# EAGLE board rwr_schematic (EAGLE 7.4.0)
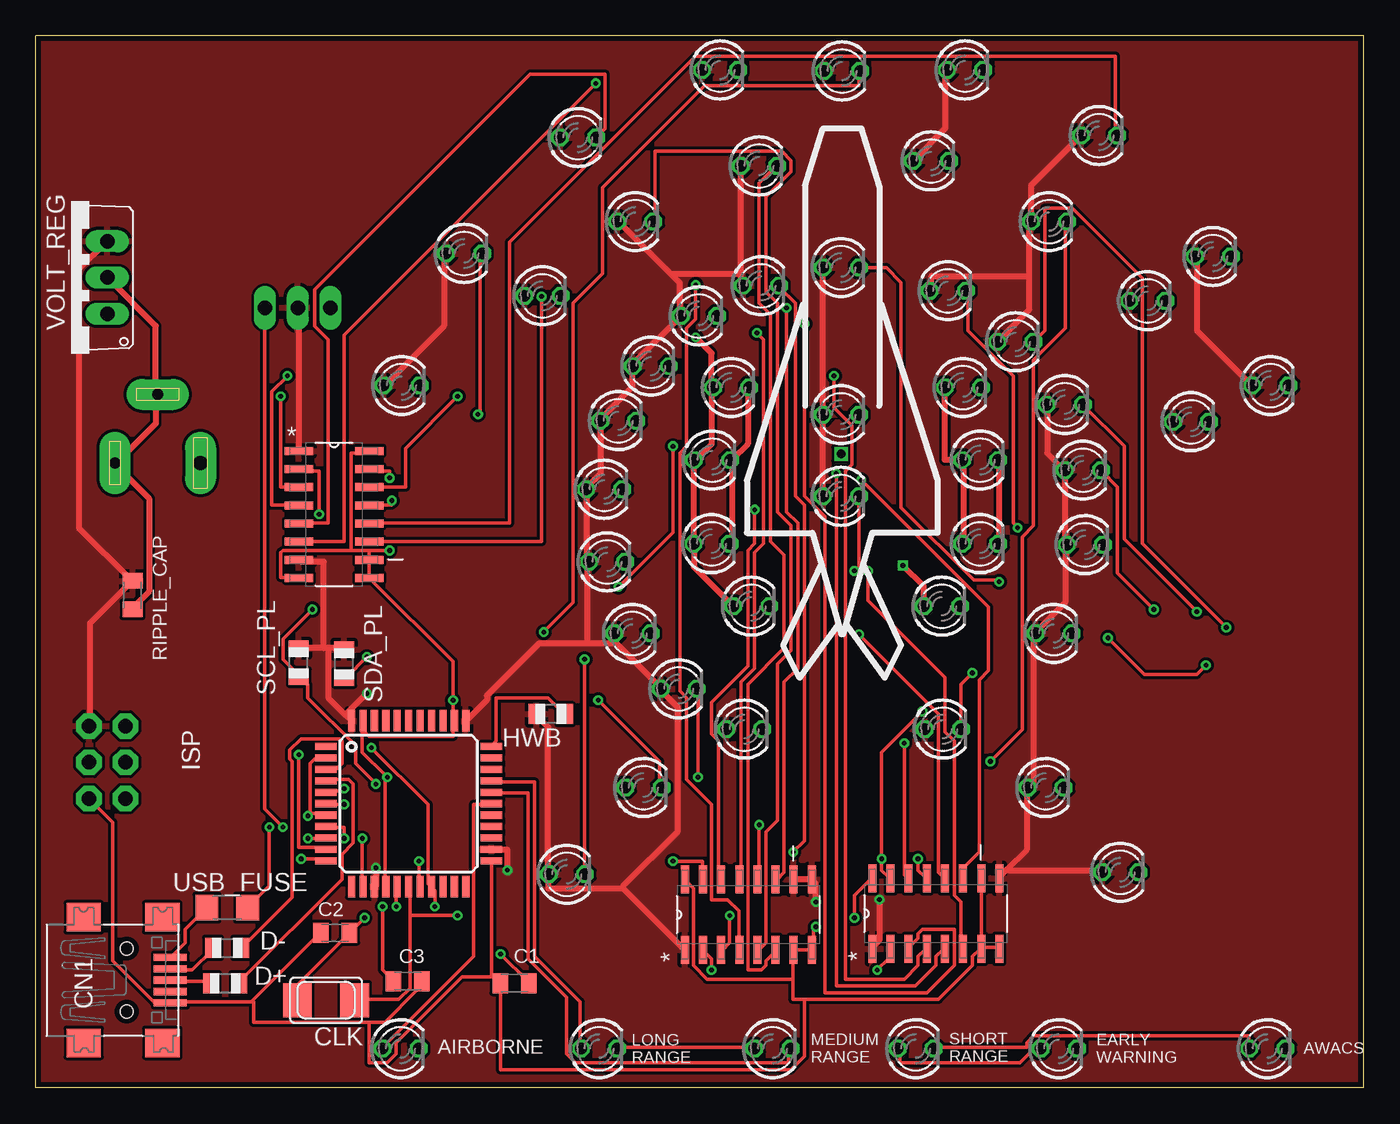
[diagram p0: board, top side]
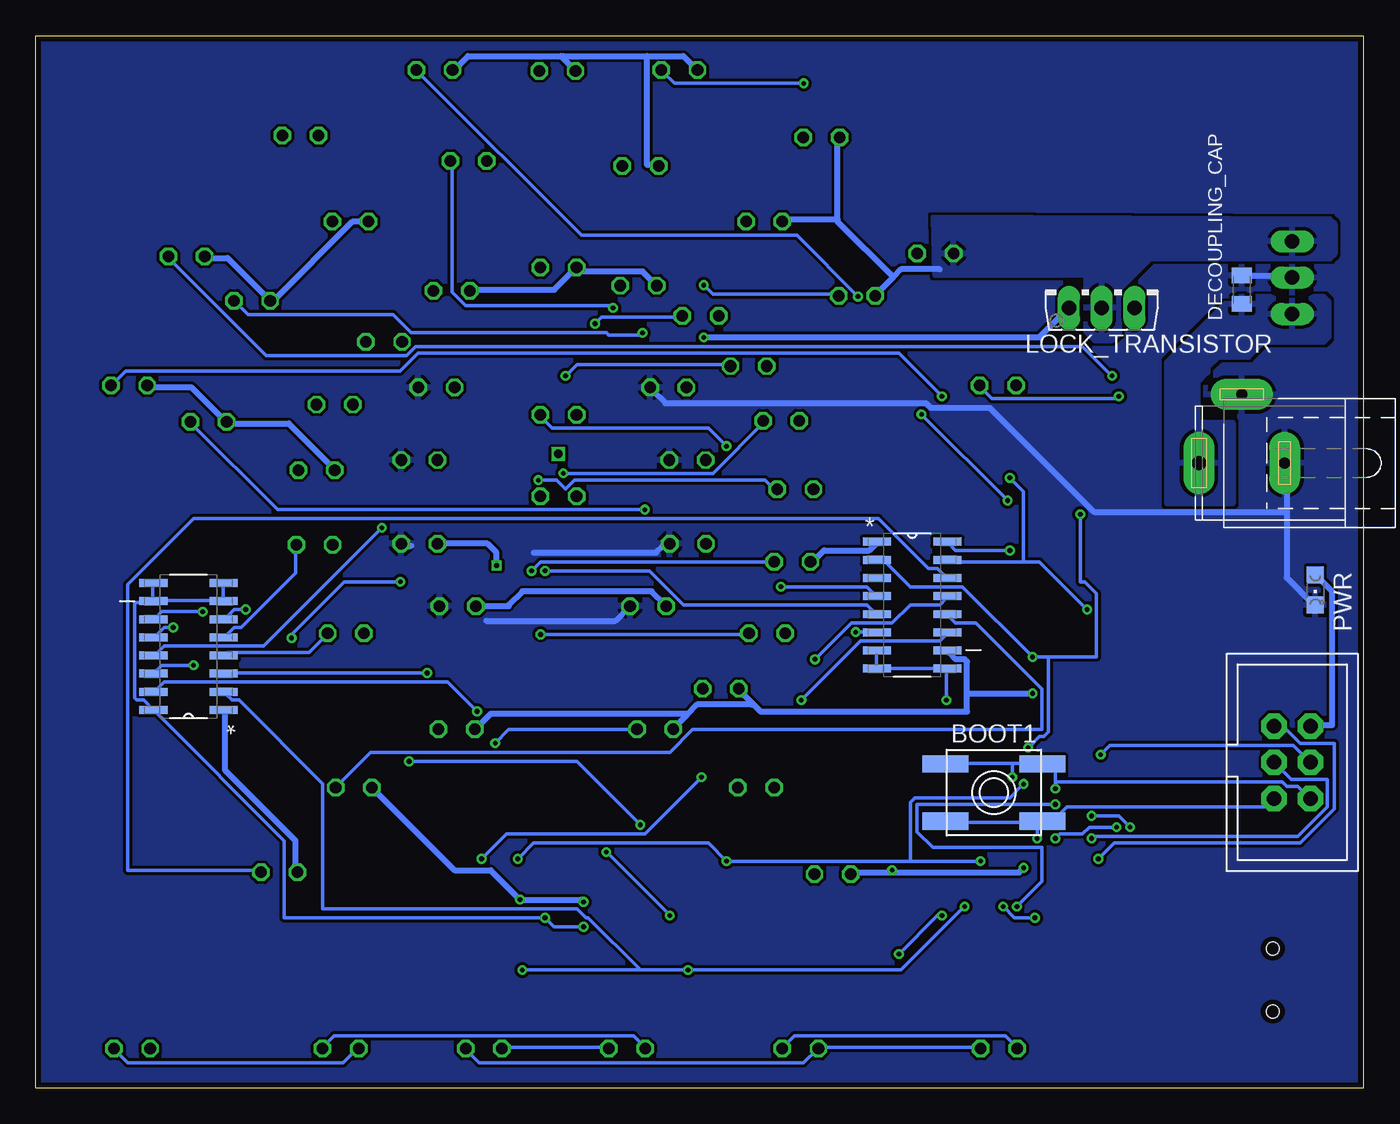
[diagram p1: board, bottom side, seen from below]

Size 92.96 x 73.66 mm. Coordinates in mm from the lower left corner, seen from the top.
Outline: 92.96,0 92.96,73.66 0,73.66 0,0 92.96,0
Copper layers (1*16): Top 0.0356mm / dielectric 1.5011mm / Bottom 0.0356mm
Design rules "LaenPCBOrder": minimum track width 6mil, minimum drill 13mil, track to track 6mil, track to pad 6mil, pad to pad 6mil, via to via 6mil, smd to smd 6mil, copper to edge 15mil, drill to drill 6mil, minimum pad ring 7mil, minimum via ring 7mil, stop-mask expansion 3mil, vias tented up to drill 0mil, thermal gap 10mil
Net classes: 0 default: width 0.254 mm; 1 Power: width 0.406 mm

## Footprints (pad centres in the part's own frame; a part is rotated, then mirrored left to right if it is on the bottom)
LED3MM = drill 0.813 octagon: A -1.27,0; K 1.27,0
EVQ-Q2 = smd 3.2 x 1.2: A -3.4,-2; A' 3.4,-2; B -3.4,2; B' 3.4,2
C0805K = smd 1.1 x 1.4: 1 -1,0; 2 1,0
NX5032 = smd 2 x 2.4: P$1 2,0; P$2 -2,0
USB-MINIB = smd 0.5 x 2.308: D+ 0,4.064; D- -0.8,4.064; GND 1.6,4.064; ID 0.8,4.064; VBUS -1.6,4.064 | smd 2 x 2.4: GND1 -4.4,-2; GND2 -4.4,3.5; GND3 4.4,3.5; GND4 4.4,-2 | hole 0.9: -2.2,1; 2.2,1
R0805 = smd 1.1 x 1.4: 1 -1,0; 2 1,0
TQFP44 = smd 1.5 x 0.5: 1 -5.8,4; 2 -5.8,3.2; 3 -5.8,2.4; 4 -5.8,1.6; 5 -5.8,0.8; 6 -5.8,0; 7 -5.8,-0.8; 8 -5.8,-1.6; 9 -5.8,-2.4; 10 -5.8,-3.2; 11 -5.8,-4; 23 5.8,-4; 24 5.8,-3.2; 25 5.8,-2.4; 26 5.8,-1.6; 27 5.8,-0.8; 28 5.8,0; 29 5.8,0.8; 30 5.8,1.6; 31 5.8,2.4; 32 5.8,3.2; 33 5.8,4 | smd 0.5 x 1.5: 12 -4,-5.8; 13 -3.2,-5.8; 14 -2.4,-5.8; 15 -1.6,-5.8; 16 -0.8,-5.8; 17 0,-5.8; 18 0.8,-5.8; 19 1.6,-5.8; 20 2.4,-5.8; 21 3.2,-5.8; 22 4,-5.8; 34 4,5.8; 35 3.2,5.8; 36 2.4,5.8; 37 1.6,5.8; 38 0.8,5.8; 39 0,5.8; 40 -0.8,5.8; 41 -1.6,5.8; 42 -2.4,5.8; 43 -3.2,5.8; 44 -4,5.8
ISP6 = drill 1.016 pad 1.778 octagon: 1 -2.54,-1.27; 2 -2.54,1.27; 3 0,-1.27; 4 0,1.27; 5 2.54,-1.27; 6 2.54,1.27
SPC4077 = drill 0.8 pad 2.184 long: 1 -3,0; 2 0,-4.8 | drill 1 pad 2.184 long: 3 3,0
TO126AV = drill 1.016 long: B 2.286,-1.27; C 0,-1.27; E -2.286,-1.27
SOIC127P600X175-16N = smd 1.981 x 0.559: 1 -2.464,4.445; 2 -2.464,3.175; 3 -2.464,1.905; 4 -2.464,0.635; 5 -2.464,-0.635; 6 -2.464,-1.905; 7 -2.464,-3.175; 8 -2.464,-4.445; 9 2.464,-4.445; 10 2.464,-3.175; 11 2.464,-1.905; 12 2.464,-0.635; 13 2.464,0.635; 14 2.464,1.905; 15 2.464,3.175; 16 2.464,4.445
CHIPLED_0805 = smd 1.2 x 1.2: A 0,-1.05; C 0,1.05
R1206 = smd 1.6 x 1.803: 1 -1.422,0; 2 1.422,0
TO220V = drill 1.016 long: 1 -2.54,-2.54; 2 0,-2.54; 3 2.54,-2.54

## Placement (x,y rotation side)
ABOVE_LED1  AMBER  [LED3MM]  56.37,47.13 0 top
BELOW_LED1  AMBER  [LED3MM]  56.37,41.42 0 top
BOOT1  EVQQ2  [EVQ-Q2]  25.89,20.67 0 bottom
C1  18pF  [C0805K]  33.51,7.34 180 top
C2  18pF  [C0805K]  20.95,10.87 180 top
C3  1uF  [C0805K]  26.04,7.48 0 top
CLK  16MHz  [NX5032]  20.32,6.14 180 top
CN1  MiniB USB  [USB-MINIB]  5.36,7.55 270 top
D+  22  [R0805]  13.26,7.34 0 top
D-  22  [R0805]  13.41,9.81 0 top
DECOUPLING_CAP  0.33uF  [C0805K]  8.54,55.88 90 bottom
HWB  10K  [R0805]  36.05,26.18 180 top
IC1  ATMEGA32U4-AU  [TQFP44]  26.11,19.9 0 top
ISP  PINHD-2X3THM  [ISP6]  5.01,22.79 270 bottom
J2  jack  [SPC4077]  8.54,43.75 180 bottom
LOCK_LED_1  RED  [LED3MM]  48.68,49.04 0 top
LOCK_LED_2  RED  [LED3MM]  47.34,43.96 0 top
LOCK_LED_3  RED  [LED3MM]  47.31,38.1 0 top
LOCK_LED_4  RED  [LED3MM]  50.09,33.73 0 top
LOCK_LED_5  RED  [LED3MM]  63.43,33.73 0 top
LOCK_LED_6  RED  [LED3MM]  66.11,38.1 0 top
LOCK_LED_7  RED  [LED3MM]  66.11,43.96 0 top
LOCK_LED_8  RED  [LED3MM]  64.91,49.04 0 top
LOCK_TRANSISTOR  BD437  [TO126AV]  18.34,55.88 0 bottom
MAIN_DIRECTION_0  AMBER  [LED3MM]  86.43,49.18 0 top
MAIN_DIRECTION_1  AMBER  [LED3MM]  82.41,58.21 0 top
MAIN_DIRECTION_2  AMBER  [LED3MM]  74.44,66.67 0 top
MAIN_DIRECTION_3  AMBER  [LED3MM]  65.05,71.26 0 top
MAIN_DIRECTION_4  AMBER  [LED3MM]  47.91,71.26 0 top
MAIN_DIRECTION_5  AMBER  [LED3MM]  37.96,66.53 0 top
MAIN_DIRECTION_6  AMBER  [LED3MM]  29.99,58.42 0 top
MAIN_DIRECTION_7  AMBER  [LED3MM]  25.61,49.18 0 top
MAIN_DIRECTION_DRIVE  TPIC2810DG4  [SOIC127P600X175-16N]  20.89,40.15 0 top
MISC_LED_DRIVE  TPIC2810DG4  [SOIC127P600X175-16N]  31.61,33.8 0 bottom
OTHER_DIRECTION_0  GREEN  [LED3MM]  80.87,46.64 0 top
OTHER_DIRECTION_1  GREEN  [LED3MM]  77.82,55.1 0 top
OTHER_DIRECTION_2  GREEN  [LED3MM]  70.94,60.65 0 top
OTHER_DIRECTION_3  GREEN  [LED3MM]  62.67,64.9 0 top
OTHER_DIRECTION_4  GREEN  [LED3MM]  50.63,64.54 0 top
OTHER_DIRECTION_5  GREEN  [LED3MM]  41.97,60.65 0 top
OTHER_DIRECTION_6  GREEN  [LED3MM]  35.47,55.46 0 top
OTHER_DIRECTION_7  GREEN  [LED3MM]  50.77,56.16 0 top
OTHER_DIRECTION_DRIVE  TPIC2810DG4  [SOIC127P600X175-16N]  49.88,12.14 90 top
PWR  GREEN  [CHIPLED_0805]  3.39,34.86 180 bottom
REAR_MAIN_LEFT1  AMBER  [LED3MM]  37.18,14.96 0 top
REAR_MAIN_RIGHT1  AMBER  [LED3MM]  75.92,15.1 0 top
REAR_OTHER_LEFT1  GREEN  [LED3MM]  42.54,21.03 0 top
REAR_OTHER_RIGHT1  GREEN  [LED3MM]  70.7,21.03 0 top
RIPPLE_CAP  .01uF  [C0805K]  6.77,34.5 270 top
SCL_PL  10K  [R0805]  18.42,29.78 90 top
SDA_PL  10K  [R0805]  21.59,29.7 90 top
SERVICABILITY_LED1  AMBER  [LED3MM]  56.45,71.19 0 top
SIGNAL_STRENGTH_0  AMBER  [LED3MM]  63.5,25.12 0 top
SIGNAL_STRENGTH_1  AMBER  [LED3MM]  71.26,31.82 0 top
SIGNAL_STRENGTH_2  AMBER  [LED3MM]  73.45,38.03 0 top
SIGNAL_STRENGTH_3  AMBER  [LED3MM]  73.31,43.25 0 top
SIGNAL_STRENGTH_4  AMBER  [LED3MM]  72.04,47.84 0 top
SIGNAL_STRENGTH_5  AMBER  [LED3MM]  68.59,52.23 0 top
SIGNAL_STRENGTH_6  AMBER  [LED3MM]  63.85,55.81 0 top
SIGNAL_STRENGTH_7  AMBER  [LED3MM]  56.37,57.43 0 top
SIGNAL_STRENGTH_8  AMBER  [LED3MM]  46.43,54.05 0 top
SIGNAL_STRENGTH_9  AMBER  [LED3MM]  43.06,50.53 0 top
SIGNAL_STRENGTH_10  AMBER  [LED3MM]  40.78,46.71 0 top
SIGNAL_STRENGTH_11  AMBER  [LED3MM]  40,36.83 0 top
SIGNAL_STRENGTH_12  AMBER  [LED3MM]  39.79,41.91 0 top
SIGNAL_STRENGTH_13  AMBER  [LED3MM]  41.77,31.82 0 top
SIGNAL_STRENGTH_14  AMBER  [LED3MM]  45.01,27.94 0 top
SIGNAL_STRENGTH_TRIANGLE  AMBER  [LED3MM]  49.6,25.12 0 top
STRENGTH_SIGNAL_DRIVE_1  TPIC2810DG4  [SOIC127P600X175-16N]  82.27,30.9 180 bottom
STRENGTH_SIGNAL_DRIVE_2  TPIC2810DG4  [SOIC127P600X175-16N]  63.01,12.21 90 top
TYPE1  AMBER  [LED3MM]  86.22,2.75 0 top
TYPE2  AMBER  [LED3MM]  71.61,2.75 0 top
TYPE3  AMBER  [LED3MM]  61.6,2.75 0 top
TYPE4  AMBER  [LED3MM]  51.58,2.75 0 top
TYPE5  AMBER  [LED3MM]  39.44,2.75 0 top
TYPE6  AMBER  [LED3MM]  25.54,2.75 0 top
USB_FUSE  500mA  [R1206]  13.41,12.63 0 top
VOLT_REG  7805TV  [TO220V]  2.47,56.73 90 top

## Library data of the parts
ABOVE_LED1 BELOW_LED1 LOCK_LED_1-LOCK_LED_8 MAIN_DIRECTION_0 MAIN_DIRECTION_1-MAIN_DIRECTION_7 OTHER_DIRECTION_0 OTHER_DIRECTION_1-OTHER_DIRECTION_7 REAR_MAIN_LEFT1 REAR_MAIN_RIGHT1 REAR_OTHER_LEFT1 REAR_OTHER_RIGHT1 SERVICABILITY_LED1 SIGNAL_STRENGTH_0 SIGNAL_STRENGTH_1-SIGNAL_STRENGTH_14 SIGNAL_STRENGTH_TRIANGLE TYPE1-TYPE6 = led; OC_NEWARK: unknown
BOOT1 CLK IC1 ISP = adaprog
C1-C3 CN1 D+ D- DECOUPLING_CAP HWB PWR RIPPLE_CAP SCL_PL SDA_PL USB_FUSE = adafruit
J2 = con-jack; OC_FARNELL: unknown; OC_NEWARK: unknown
LOCK_TRANSISTOR = transistor-power
MAIN_DIRECTION_DRIVE MISC_LED_DRIVE OTHER_DIRECTION_DRIVE STRENGTH_SIGNAL_DRIVE_1 STRENGTH_SIGNAL_DRIVE_2 = ti_led_driver; MPN: TPIC2810DG4; OC_FARNELL: -; OC_NEWARK: 02M4281; PACKAGE: SOIC-16; SUPPLIER: TEXAS INSTRUMENTS
VOLT_REG = linear

## Nets
+3V3: C3.1 IC1.6
GND [Power]: DECOUPLING_CAP.2 J2.1 J2.2 LOCK_LED_1.K LOCK_LED_2.K LOCK_LED_3.K LOCK_LED_4.K LOCK_LED_5.K LOCK_LED_6.K LOCK_LED_7.K LOCK_LED_8.K PWR.C RIPPLE_CAP.2 VOLT_REG.2
HWB: HWB.1 IC1.33
JACK_VCC [Power]: DECOUPLING_CAP.1 J2.3 VOLT_REG.1
LOCK_LED: IC1.8 LOCK_TRANSISTOR.B
LOCK_LED_1 [Power]: LOCK_LED_1.A LOCK_LED_2.A LOCK_LED_3.A LOCK_LED_4.A LOCK_LED_5.A LOCK_LED_6.A LOCK_LED_7.A LOCK_LED_8.A LOCK_TRANSISTOR.E
MAIN_DIRECTION_LED0: MAIN_DIRECTION_7.K MAIN_DIRECTION_DRIVE.3
MAIN_DIRECTION_LED1: MAIN_DIRECTION_1.K MAIN_DIRECTION_DRIVE.4
MAIN_DIRECTION_LED2: MAIN_DIRECTION_5.K MAIN_DIRECTION_DRIVE.5
MAIN_DIRECTION_LED3: MAIN_DIRECTION_4.K MAIN_DIRECTION_DRIVE.6
MAIN_DIRECTION_LED4: MAIN_DIRECTION_3.K MAIN_DIRECTION_DRIVE.11
MAIN_DIRECTION_LED5: MAIN_DIRECTION_2.K MAIN_DIRECTION_DRIVE.12
MAIN_DIRECTION_LED6: MAIN_DIRECTION_6.K MAIN_DIRECTION_DRIVE.13
MAIN_DIRECTION_LED7: MAIN_DIRECTION_0.K MAIN_DIRECTION_DRIVE.14
MISO: IC1.11 ISP.1
MOSI: IC1.10 ISP.4
N$10: IC1.2 IC1.7 USB_FUSE.2
N$15: MISC_LED_DRIVE.12 REAR_OTHER_RIGHT1.K
N$16: MISC_LED_DRIVE.14 REAR_MAIN_RIGHT1.K
N$17: ABOVE_LED1.K MISC_LED_DRIVE.4
N$19: MISC_LED_DRIVE.6 SERVICABILITY_LED1.K
N$21: MISC_LED_DRIVE.11 REAR_OTHER_LEFT1.K
N$25: BELOW_LED1.K MISC_LED_DRIVE.5
N$61: D-.2 IC1.3
N$62: D+.2 IC1.4
N$63: C2.1 CLK.P$1 IC1.16
N$64: C1.1 CLK.P$2 IC1.17
N$67: CN1.D+ D+.1
N$68: CN1.D- D-.1
N$85: REAR_OTHER_LEFT1.A
OTHER_DIRECTION_LED0: OTHER_DIRECTION_7.K OTHER_DIRECTION_DRIVE.3
OTHER_DIRECTION_LED1: OTHER_DIRECTION_6.K OTHER_DIRECTION_DRIVE.4
OTHER_DIRECTION_LED2: OTHER_DIRECTION_5.K OTHER_DIRECTION_DRIVE.5
OTHER_DIRECTION_LED3: OTHER_DIRECTION_4.K OTHER_DIRECTION_DRIVE.6
OTHER_DIRECTION_LED4: OTHER_DIRECTION_3.K OTHER_DIRECTION_DRIVE.11
OTHER_DIRECTION_LED5: OTHER_DIRECTION_2.K OTHER_DIRECTION_DRIVE.12
OTHER_DIRECTION_LED6: OTHER_DIRECTION_1.K OTHER_DIRECTION_DRIVE.13
OTHER_DIRECTION_LED7: OTHER_DIRECTION_0.K OTHER_DIRECTION_DRIVE.14
REAR_MAIN_LEFT1: MISC_LED_DRIVE.13 REAR_MAIN_LEFT1.K
ROUTEP: BOOT1.B BOOT1.B' C1.2 C2.2 C3.2 CN1.GND IC1.5 IC1.15 IC1.23 IC1.35 IC1.43 ISP.6 MAIN_DIRECTION_DRIVE.8 MAIN_DIRECTION_DRIVE.9 MAIN_DIRECTION_DRIVE.10 MAIN_DIRECTION_DRIVE.16 MISC_LED_DRIVE.7 MISC_LED_DRIVE.8 MISC_LED_DRIVE.9 MISC_LED_DRIVE.16 OTHER_DIRECTION_DRIVE.7 OTHER_DIRECTION_DRIVE.8 OTHER_DIRECTION_DRIVE.16 STRENGTH_SIGNAL_DRIVE_1.7 STRENGTH_SIGNAL_DRIVE_1.8 STRENGTH_SIGNAL_DRIVE_1.9 STRENGTH_SIGNAL_DRIVE_1.10 STRENGTH_SIGNAL_DRIVE_1.16 STRENGTH_SIGNAL_DRIVE_2.7 STRENGTH_SIGNAL_DRIVE_2.8 STRENGTH_SIGNAL_DRIVE_2.10 STRENGTH_SIGNAL_DRIVE_2.16
RST: BOOT1.A BOOT1.A' IC1.13 ISP.5
SCK: IC1.9 ISP.3
SIGNAL_STRENGTH_LED0: SIGNAL_STRENGTH_0.K STRENGTH_SIGNAL_DRIVE_1.3
SIGNAL_STRENGTH_LED1: SIGNAL_STRENGTH_1.K STRENGTH_SIGNAL_DRIVE_1.4
SIGNAL_STRENGTH_LED2: SIGNAL_STRENGTH_2.K STRENGTH_SIGNAL_DRIVE_1.5
SIGNAL_STRENGTH_LED3: SIGNAL_STRENGTH_3.K STRENGTH_SIGNAL_DRIVE_1.6
SIGNAL_STRENGTH_LED4: SIGNAL_STRENGTH_4.K STRENGTH_SIGNAL_DRIVE_1.11
SIGNAL_STRENGTH_LED5: SIGNAL_STRENGTH_5.K STRENGTH_SIGNAL_DRIVE_1.12
SIGNAL_STRENGTH_LED6: SIGNAL_STRENGTH_6.K STRENGTH_SIGNAL_DRIVE_1.13
SIGNAL_STRENGTH_LED7: SIGNAL_STRENGTH_7.K STRENGTH_SIGNAL_DRIVE_1.14
SIGNAL_STRENGTH_LED8: SIGNAL_STRENGTH_8.K STRENGTH_SIGNAL_DRIVE_2.3
SIGNAL_STRENGTH_LED9: SIGNAL_STRENGTH_9.K STRENGTH_SIGNAL_DRIVE_2.4
SIGNAL_STRENGTH_LED10: SIGNAL_STRENGTH_10.K STRENGTH_SIGNAL_DRIVE_2.5
SIGNAL_STRENGTH_LED11: SIGNAL_STRENGTH_11.K STRENGTH_SIGNAL_DRIVE_2.6
SIGNAL_STRENGTH_LED12: SIGNAL_STRENGTH_12.K STRENGTH_SIGNAL_DRIVE_2.11
SIGNAL_STRENGTH_LED13: SIGNAL_STRENGTH_13.K STRENGTH_SIGNAL_DRIVE_2.12
SIGNAL_STRENGTH_LED14: SIGNAL_STRENGTH_14.K STRENGTH_SIGNAL_DRIVE_2.13
SIGNAL_STRENGTH_TRIANGLE_LED: SIGNAL_STRENGTH_TRIANGLE.K STRENGTH_SIGNAL_DRIVE_2.14
TWI_SCL: IC1.18 MAIN_DIRECTION_DRIVE.15 MISC_LED_DRIVE.15 OTHER_DIRECTION_DRIVE.15 SCL_PL.1 STRENGTH_SIGNAL_DRIVE_1.15 STRENGTH_SIGNAL_DRIVE_2.15
TWI_SDA: IC1.19 MAIN_DIRECTION_DRIVE.2 MISC_LED_DRIVE.2 OTHER_DIRECTION_DRIVE.2 SDA_PL.1 STRENGTH_SIGNAL_DRIVE_1.2 STRENGTH_SIGNAL_DRIVE_2.2
TYPE_LED0: IC1.28 TYPE2.K TYPE4.A TYPE5.K TYPE6.A
TYPE_LED1: IC1.29 TYPE1.K TYPE2.A TYPE3.A TYPE4.K
TYPE_LED2: IC1.30 TYPE1.A TYPE3.K TYPE5.A TYPE6.K
VBUS: CN1.VBUS USB_FUSE.1
VCC [Power]: ABOVE_LED1.A BELOW_LED1.A HWB.2 IC1.14 IC1.24 IC1.34 IC1.44 ISP.2 LOCK_TRANSISTOR.C MAIN_DIRECTION_0.A MAIN_DIRECTION_1.A MAIN_DIRECTION_2.A MAIN_DIRECTION_3.A MAIN_DIRECTION_4.A MAIN_DIRECTION_5.A MAIN_DIRECTION_6.A MAIN_DIRECTION_7.A MAIN_DIRECTION_DRIVE.1 MAIN_DIRECTION_DRIVE.7 MISC_LED_DRIVE.1 MISC_LED_DRIVE.10 OTHER_DIRECTION_0.A OTHER_DIRECTION_1.A OTHER_DIRECTION_2.A OTHER_DIRECTION_3.A OTHER_DIRECTION_4.A OTHER_DIRECTION_5.A OTHER_DIRECTION_6.A OTHER_DIRECTION_7.A OTHER_DIRECTION_DRIVE.1 OTHER_DIRECTION_DRIVE.9 OTHER_DIRECTION_DRIVE.10 PWR.A REAR_MAIN_LEFT1.A REAR_MAIN_RIGHT1.A REAR_OTHER_RIGHT1.A RIPPLE_CAP.1 SCL_PL.2 SDA_PL.2 SERVICABILITY_LED1.A SIGNAL_STRENGTH_0.A SIGNAL_STRENGTH_1.A SIGNAL_STRENGTH_2.A SIGNAL_STRENGTH_3.A SIGNAL_STRENGTH_4.A SIGNAL_STRENGTH_5.A SIGNAL_STRENGTH_6.A SIGNAL_STRENGTH_7.A SIGNAL_STRENGTH_8.A SIGNAL_STRENGTH_9.A SIGNAL_STRENGTH_10.A SIGNAL_STRENGTH_11.A SIGNAL_STRENGTH_12.A SIGNAL_STRENGTH_13.A SIGNAL_STRENGTH_14.A SIGNAL_STRENGTH_TRIANGLE.A STRENGTH_SIGNAL_DRIVE_1.1 STRENGTH_SIGNAL_DRIVE_2.1 STRENGTH_SIGNAL_DRIVE_2.9 VOLT_REG.3

## Tracks (layer width: path | path; a pad name or v marks a point on that pad's centre or on a via)
+3V3  (via drill 0.33)
  Top 0.254: v24.29,12.7 24.29,8.26 24.92,7.62 C3.1 | v21.59,19.84 20.32,19.84 IC1.6
  Bottom 0.254: v24.29,12.7 22.54,14.45 22.54,16.83 30.16,16.83 31.27,17.94 31.27,19.84 v21.59,19.84
GND
  Top 0.406: RIPPLE_CAP.2 6.83,33.66 7.94,34.77 7.94,41.27 5.56,43.66 J2.1 5.71,43.81 8.41,46.51 8.41,48.42 J2.2 8.41,48.58 8.41,53.34 5.08,56.67 VOLT_REG.2 | LOCK_LED_1.K 49.85,48.9 49.85,45.09 48.74,43.97 LOCK_LED_2.K 48.74,43.81 48.74,38.26 48.9,38.1 LOCK_LED_3.K | LOCK_LED_7.K 67.47,43.81 67.47,38.1 LOCK_LED_6.K
  Bottom 0.406: 5.4,40.32 5.4,43.66 J2.1 | 5.4,40.32 5.4,35.72 3.49,33.81 PWR.C | DECOUPLING_CAP.2 8.41,56.83 5.08,56.83 VOLT_REG.2 | 66.67,37.94 67.31,37.94 LOCK_LED_6.K | 61.44,32.7 52.39,32.7 51.44,33.66 LOCK_LED_4.K | 58.1,37.47 49.53,37.47 49.05,37.94 LOCK_LED_3.K | 5.4,40.32 18.89,40.32 26.19,47.62 30.32,47.62 30.64,47.94 48.9,47.94 49.85,48.9 LOCK_LED_1.K
  pour Bottom (isolate 0.203, rank 6): -6.48,77.6 100.71,77.6 105.16,73.15 105.16,3.3 97.79,-4.06 -0.89,-4.06 -7.24,2.29 -7.24,76.83
HWB
  Top 0.254: HWB.1 36.99,26.19 35.88,27.3 32.23,27.3 32.23,24.29 31.91,23.97 IC1.33
JACK_VCC
  pour Bottom (rank 4): 9.17,45.51 9.17,40.92 13.76,40.92 13.76,46.57 9.17,46.57
  pour Bottom (isolate 0.61): 13.76,46.57 13.76,50.8 9.17,55.39 2.82,55.39 2.47,55.03 2.47,52.56 2.82,52.21 7.06,52.21 8.11,51.15 10.23,51.15 10.94,50.45 10.94,50.09 11.64,49.39 11.64,46.57
LOCK_LED  (via drill 0.33)
  Top 0.254: v21.59,17.46 21.59,18.26 20.32,18.26 IC1.8 | v17.3,18.26 16.03,19.53 16.03,54.61 LOCK_TRANSISTOR.B
  Bottom 0.254: v21.59,17.46 21.27,17.78 19.68,17.78 19.21,18.26 v17.3,18.26
LOCK_LED_1  (via drill 0.33)
  Top 0.406: LOCK_LED_6.A 64.93,38.1 64.93,43.81 LOCK_LED_7.A 63.64,43.96 LOCK_LED_8.A | v46.2,52.55 47.31,51.44 47.31,49.21 LOCK_LED_1.A 47.31,48.9 47.31,45.09 46.2,43.97 LOCK_LED_2.A 46.07,38.1 | LOCK_LED_3.A 46.07,38.1 | 46.07,38.1 46.07,36.48 LOCK_LED_4.A | LOCK_LED_5.A 62.16,35.12 v60.71,36.58
  Bottom 0.406: LOCK_LED_4.A 48.9,33.81 49.85,34.77 58.9,34.77 59.85,33.81 59.85,33.73 LOCK_LED_5.A | v46.2,52.55 22.7,52.55 LOCK_TRANSISTOR.E | v60.71,36.58 60.71,37.47 61.34,38.1 LOCK_LED_6.A | LOCK_LED_6.A
MAIN_DIRECTION_LED0  (via drill 0.33)
  Top 0.254: v17.14,48.42 17.14,42.07 18.41,42.07 MAIN_DIRECTION_DRIVE.3
  Bottom 0.254: v17.14,48.42 17.3,48.26 26.04,48.26 26.83,49.05 MAIN_DIRECTION_7.K
MAIN_DIRECTION_LED1  (via drill 0.33)
  Top 0.254: v17.62,49.85 16.51,48.74 16.51,40.8 18.41,40.8 MAIN_DIRECTION_DRIVE.4
  Bottom 0.254: v17.62,49.85 19.68,51.91 66.36,51.91 66.99,51.28 76.83,51.28 83.66,58.1 MAIN_DIRECTION_1.K
MAIN_DIRECTION_LED2
  Top 0.254: MAIN_DIRECTION_DRIVE.5 18.57,39.53 20.48,39.53 20.48,52.39 19.53,53.34 19.53,55.88 34.61,70.96 39.85,70.96 39.85,67.15 39.37,66.67 MAIN_DIRECTION_5.K
MAIN_DIRECTION_LED3  (via drill 0.33)
  Top 0.254: v39.21,70.33 21.59,52.7 21.59,38.26 18.57,38.26 MAIN_DIRECTION_DRIVE.6
  Bottom 0.254: v39.21,70.33 48.26,70.33 49.05,71.12 MAIN_DIRECTION_4.K
MAIN_DIRECTION_LED4  (via drill 0.33)
  Top 0.254: v35.4,55.4 35.4,38.26 23.5,38.26 MAIN_DIRECTION_DRIVE.11
  Bottom 0.254: v35.4,55.4 39.69,59.69 54.77,59.69 66.2,71.12 MAIN_DIRECTION_3.K
MAIN_DIRECTION_LED5
  Top 0.254: MAIN_DIRECTION_DRIVE.12 23.5,39.53 33.18,39.53 33.18,59.21 46.2,72.23 75.56,72.23 75.56,66.67 MAIN_DIRECTION_2.K
MAIN_DIRECTION_LED6  (via drill 0.33)
  Top 0.254: v24.92,41.12 24.92,40.8 23.5,40.8 MAIN_DIRECTION_DRIVE.13 | v30.96,47.15 31.11,47.31 31.11,58.26 MAIN_DIRECTION_6.K
  Bottom 0.254: v30.96,47.15 v24.92,41.12
MAIN_DIRECTION_LED7  (via drill 0.33)
  Top 0.254: v29.53,48.42 25.88,44.77 25.88,42.07 23.5,42.07 MAIN_DIRECTION_DRIVE.14
  Bottom 0.254: v29.53,48.42 32.54,51.44 66.2,51.44 67.47,50.16 86.68,50.16 87.63,49.21 MAIN_DIRECTION_0.K
MISO  (via drill 0.33)
  Top 0.254: v18.57,16.03 20.16,16.03 IC1.11
  Bottom 0.254: v18.57,16.03 17.46,17.14 4.45,17.14 2.06,19.53 2.06,24.13 4.45,24.13 5.56,25.24 6.19,25.24 ISP.1
MOSI  (via drill 0.33)
  Top 0.254: v18.41,23.34 18.41,16.83 20.16,16.83 IC1.10
  Bottom 0.254: v18.41,23.34 17.78,23.97 4.92,23.97 3.81,22.86 ISP.4
N$10  (via drill 0.33)
  Top 0.254: 19.21,19.21 20.16,19.21 IC1.7 | 19.21,19.21 19.21,22.7 19.53,23.02 20.16,23.02 IC1.2 | v16.35,18.26 16.35,14.13 14.92,12.7 USB_FUSE.2 | 19.21,19.21 v19.05,19.05
  Bottom 0.254: v16.35,18.26 17.14,19.05 v19.05,19.05
N$15
  Bottom 0.254: MISC_LED_DRIVE.12 29.05,33.02 28.57,32.54 27.15,32.54 22.54,27.94 22.54,25.08 46.99,25.08 48.58,23.5 69.53,23.5 71.91,21.11 REAR_OTHER_RIGHT1.K
N$16
  Bottom 0.254: MISC_LED_DRIVE.14 29.21,35.72 29.84,36.35 30.48,36.35 33.97,39.85 81.92,39.85 86.52,35.24 86.52,15.24 77.31,15.24 REAR_MAIN_RIGHT1.K
N$17  (via drill 0.33)
  Top 0.254: v40.8,35.08 44.61,38.89 v44.61,44.93
  Bottom 0.254: v40.8,35.08 34.77,35.08 34.13,34.45 MISC_LED_DRIVE.4 | v44.61,44.93 45.88,46.2 56.83,46.2 57.63,46.99 ABOVE_LED1.K
N$18  (via drill 0.6)
  other vias: 56.37,44.38
N$19  (via drill 0.33)
  Top 0.254: v35.56,31.91 37.62,33.97 37.62,54.93 39.69,56.99 39.69,63.02 46.83,70.17 57.63,70.17 57.63,71.12 SERVICABILITY_LED1.K
  Bottom 0.254: v35.56,31.91 34.13,31.91 MISC_LED_DRIVE.6
N$21  (via drill 0.33)
  Top 0.254: v39.37,27.15 43.66,22.86 43.66,21.11 REAR_OTHER_LEFT1.K
  Bottom 0.254: v39.37,27.15 35.24,31.27 29.69,31.27 29.21,31.75 MISC_LED_DRIVE.11
N$25  (via drill 0.33)
  Top 0.254: v57.31,36.2 57.63,36.51 57.63,41.27 BELOW_LED1.K
  Bottom 0.254: v57.31,36.2 50.01,36.2 47.62,33.81 34.77,33.81 34.13,33.18 MISC_LED_DRIVE.5
N$61
  Top 0.254: D-.2 14.45,9.84 17.94,13.34 17.94,22.86 17.78,23.02 17.78,23.65 18.57,24.45 21.27,24.45 21.43,24.29 21.43,22.7 21.11,22.38 20.32,22.38 IC1.3
N$62
  Top 0.254: D+.2 14.29,7.46 21.43,14.61 21.43,16.35 22.23,17.14 22.23,21.27 21.91,21.59 20.32,21.59 IC1.4
N$63  (via drill 0.33)
  Top 0.254: CLK.P$1 18.41,6.19 18.41,7.3 21.91,10.79 C2.1 22.07,10.95 v23.02,11.91 | v25.24,12.7 25.24,13.97 IC1.16
  Bottom 0.254: v25.24,12.7 24.45,11.91 v23.02,11.91
N$64  (via drill 0.33)
  Top 0.254: v32.54,9.37 34.45,7.46 C1.1 | 26.19,12.06 v29.53,12.06 | 26.19,12.06 26.19,13.97 IC1.17 | 26.19,12.06 26.19,6.99 25.4,6.19 22.38,6.19 CLK.P$2
  Bottom 0.254: v32.54,9.37 29.84,12.06 v29.53,12.06
N$67
  Top 0.254: D+.1 12.22,7.46 9.53,7.46 CN1.D+
N$68
  Top 0.254: D-.1 12.38,9.68 10.95,8.26 9.53,8.26 CN1.D-
OTHER_DIRECTION_LED0  (via drill 0.33)
  Top 0.254: v48.58,12.06 48.58,10.16 48.1,9.68 OTHER_DIRECTION_DRIVE.3 | v53.02,16.51 53.82,17.3 53.82,40.8 53.18,41.43 53.18,54.93 52.07,56.04 OTHER_DIRECTION_7.K
  Bottom 0.254: v53.02,16.51 v48.58,12.06
OTHER_DIRECTION_LED1  (via drill 0.33)
  Top 0.254: v46.2,56.2 46.2,53.82 45.56,53.18 45.56,44.93 45.09,44.45 45.09,27.78 45.56,27.3 45.56,21.59 47.31,19.84 47.31,13.18 48.42,13.18 49.21,12.38 49.21,9.68 OTHER_DIRECTION_DRIVE.4
  Bottom 0.254: v46.2,56.2 45.56,55.56 36.83,55.56 OTHER_DIRECTION_6.K
OTHER_DIRECTION_LED2
  Top 0.254: OTHER_DIRECTION_DRIVE.5 50.64,9.68 51.12,10.16 51.12,17.94 51.91,18.73 51.91,29.69 52.86,30.64 52.86,39.37 51.91,40.32 51.91,54.93 51.12,55.72 51.12,62.39 52.86,64.14 52.86,64.93 52.23,65.56 43.34,65.56 43.34,60.8 OTHER_DIRECTION_5.K
OTHER_DIRECTION_LED3
  Top 0.254: OTHER_DIRECTION_DRIVE.6 51.75,9.53 51.12,8.89 51.12,8.57 50.8,8.26 49.85,8.26 49.85,28.26 52.39,30.8 52.39,37.31 51.44,38.26 51.44,54.13 50.64,54.93 50.64,63.34 51.75,64.45 OTHER_DIRECTION_4.K
OTHER_DIRECTION_LED4  (via drill 0.33)
  Top 0.254: v52.55,54.61 52.55,40.32 53.34,39.53 53.34,29.37 52.39,28.42 52.39,15.08 51.91,14.61 OTHER_DIRECTION_DRIVE.11
  Bottom 0.254: v52.55,54.61 52.7,54.77 62.87,54.77 63.82,55.72 63.82,64.77 OTHER_DIRECTION_3.K
OTHER_DIRECTION_LED5  (via drill 0.33)
  Top 0.254: v50.64,18.41 50.64,14.61 OTHER_DIRECTION_DRIVE.12 | v66.83,22.86 69.06,25.08 69.06,38.58 69.85,39.37 69.85,50.96 72.07,53.18 72.07,60.64 OTHER_DIRECTION_2.K
  Bottom 0.254: v50.64,18.41 55.09,22.86 v66.83,22.86
OTHER_DIRECTION_LED6  (via drill 0.33)
  Top 0.254: v50.48,52.86 50.96,52.39 50.96,38.1 50.32,37.47 50.32,29.37 49.37,28.42 49.37,14.61 OTHER_DIRECTION_DRIVE.13
  Bottom 0.254: v50.48,52.86 50.64,52.7 52.86,52.7 53.02,52.86 66.67,52.86 67.94,54.13 78.11,54.13 79.06,55.09 OTHER_DIRECTION_1.K
OTHER_DIRECTION_LED7  (via drill 0.33)
  Top 0.254: v50.32,40.48 50.32,38.1 49.85,37.62 49.85,29.53 47.31,26.99 47.31,24.77 47.78,24.29 47.78,14.76 47.94,14.61 OTHER_DIRECTION_DRIVE.14
  Bottom 0.254: v50.32,40.48 76.04,40.48 82.07,46.51 OTHER_DIRECTION_0.K
REAR_MAIN_LEFT1  (via drill 0.33)
  Top 0.254: v38.42,30 38.42,15.08 REAR_MAIN_LEFT1.K
  Bottom 0.254: v38.42,30 35.88,32.54 33.02,32.54 31.75,33.81 29.69,33.81 29.21,34.29 MISC_LED_DRIVE.13
ROUTEP  (via drill 0.33)
  Top 0.254: 66.2,9.84 67.31,9.84 STRENGTH_SIGNAL_DRIVE_2.8 | 66.2,9.84 66.2,14.61 STRENGTH_SIGNAL_DRIVE_2.10 | 66.2,9.84 STRENGTH_SIGNAL_DRIVE_2.7 66.04,9.68 65.56,9.21 65.56,8.57 63.18,6.19 53.82,6.19 | 53.02,7.62 46.99,7.62 46.04,8.57 46.04,13.97 45.56,14.45 OTHER_DIRECTION_DRIVE.16 | 53.02,7.62 53.02,9.53 OTHER_DIRECTION_DRIVE.7 53.18,9.68 54.29,9.68 OTHER_DIRECTION_DRIVE.8 54.45,9.68 54.45,11.11 v54.61,11.27 | v57.31,11.91 57.31,13.49 58.42,14.61 STRENGTH_SIGNAL_DRIVE_2.16 | 53.82,6.19 53.02,6.19 53.02,7.62 | 23.34,37.62 22.07,37.62 | 22.07,37.62 17.3,37.62 17.14,37.47 17.14,35.72 18.41,35.72 MAIN_DIRECTION_DRIVE.8 | 23.34,37.62 23.34,36.99 MAIN_DIRECTION_DRIVE.10 23.34,36.83 23.34,35.72 MAIN_DIRECTION_DRIVE.9 23.5,35.56 29.21,29.84 v29.21,27.15 29.21,25.72 IC1.35 29.21,25.56 29.21,24.61 23.34,24.61 23.02,24.92 23.02,25.56 IC1.43 22.86,25.56 22.86,23.5 24.45,21.91 24.45,21.75 | 22.07,37.62 22.07,44.45 23.34,44.45 MAIN_DIRECTION_DRIVE.16 | 23.34,37.62 v24.77,37.62 | 24.45,21.75 24.45,14.13 IC1.15 | v21.59,20.95 21.59,20.8 20.32,20.8 IC1.5 | 31.99,7.86 31.91,7.94 31.91,15.88 IC1.23 | 31.99,7.86 32.38,7.46 C1.2 32.54,7.3 32.54,1.27 52.86,1.27 53.82,2.22 53.82,6.19 | 15.16,6.11 15.08,6.03 9.53,6.03 CN1.GND 9.37,6.03 8.26,6.03 5.4,8.89 5.4,18.57 3.81,20.16 ISP.6 | 15.16,6.11 19.84,10.79 C2.2 | 23.34,4.6 15.24,4.6 15.24,6.03 15.16,6.11 | 23.34,4.6 24.45,4.6 26.67,6.83 26.67,7.14 26.99,7.46 C3.2 | 23.34,4.6 23.34,1.75 24.61,1.75 25.24,2.38 25.24,3.17 29.84,7.78 31.91,7.78 31.99,7.86 | v24.61,21.75 24.45,21.75
  Bottom 0.254: 79.85,34.13 79.85,35.24 STRENGTH_SIGNAL_DRIVE_1.8 | STRENGTH_SIGNAL_DRIVE_1.10 84.77,33.97 86.04,33.97 86.04,27.3 85.88,27.15 85.41,27.15 84.77,26.51 STRENGTH_SIGNAL_DRIVE_1.16 84.61,26.35 75.56,17.3 75.56,11.91 v57.31,11.91 56.67,11.27 v54.61,11.27 | STRENGTH_SIGNAL_DRIVE_1.9 84.77,35.24 84.77,34.13 STRENGTH_SIGNAL_DRIVE_1.10 | 79.85,34.13 84.61,34.13 STRENGTH_SIGNAL_DRIVE_1.10 | 79.85,34.13 STRENGTH_SIGNAL_DRIVE_1.7 | v24.77,37.62 28.57,37.62 29.05,38.1 MISC_LED_DRIVE.16 | MISC_LED_DRIVE.7 34.13,30.48 34.13,29.37 MISC_LED_DRIVE.8 33.97,29.37 29.21,29.37 MISC_LED_DRIVE.9 29.21,29.21 v29.21,27.15 | 21.59,21.43 21.59,22.54 22.38,22.54 BOOT1.B' 22.54,22.7 24.61,22.7 | 21.59,21.43 v21.59,20.95 | 24.61,22.7 29.21,22.7 BOOT1.B | 21.59,21.43 5.71,21.43 5.4,21.11 4.6,21.11 3.81,20.32 ISP.6 | 24.61,22.7 v24.61,21.75
RST  (via drill 0.33)
  Top 0.254: v22.86,17.46 22.86,14.13 IC1.13
  Bottom 0.254: 22.86,18.57 v22.86,17.46 | 22.86,18.57 22.54,18.57 BOOT1.A' | 22.86,18.57 29.21,18.57 BOOT1.A | 22.86,18.57 BOOT1.A' | ISP.5 6.35,20.16 6.83,19.68 20.8,19.68 21.75,18.73 22.38,18.73 BOOT1.A'
SCK  (via drill 0.33)
  Top 0.254: v19.05,17.46 20.16,17.46 IC1.9
  Bottom 0.254: v19.05,17.46 18.89,17.62 4.6,17.62 2.54,19.68 2.54,21.59 5.08,21.59 6.19,22.7 ISP.3
SIGNAL_STRENGTH_LED0  (via drill 0.33)
  Top 0.254: v65.56,29.05 64.77,28.26 64.77,25.24 SIGNAL_STRENGTH_0.K
  Bottom 0.254: v65.56,29.05 79.69,29.05 STRENGTH_SIGNAL_DRIVE_1.3
SIGNAL_STRENGTH_LED1
  Bottom 0.254: STRENGTH_SIGNAL_DRIVE_1.4 79.69,30.32 79.53,30.48 73.82,30.48 72.55,31.75 SIGNAL_STRENGTH_1.K
SIGNAL_STRENGTH_LED2
  Bottom 0.254: STRENGTH_SIGNAL_DRIVE_1.5 79.69,31.59 79.06,32.23 78.58,32.23 74.77,36.04 74.77,37.94 SIGNAL_STRENGTH_2.K
SIGNAL_STRENGTH_LED3  (via drill 0.33)
  Top 0.254: v78.26,33.5 75.72,36.04 75.72,42.07 74.61,43.18 SIGNAL_STRENGTH_3.K
  Bottom 0.254: v78.26,33.5 79.06,33.5 79.69,32.86 STRENGTH_SIGNAL_DRIVE_1.6
SIGNAL_STRENGTH_LED4  (via drill 0.33)
  Top 0.254: v81.28,33.34 76.2,38.42 76.2,44.93 73.34,47.78 SIGNAL_STRENGTH_4.K
  Bottom 0.254: v81.28,33.34 84.14,33.34 84.61,32.86 STRENGTH_SIGNAL_DRIVE_1.11
SIGNAL_STRENGTH_LED5  (via drill 0.33)
  Top 0.254: v83.34,32.23 77.47,38.1 77.47,56.67 72.55,61.59 70.64,61.59 70.64,53.02 70.01,52.39 SIGNAL_STRENGTH_5.K
  Bottom 0.254: v83.34,32.23 83.98,32.23 84.61,31.59 STRENGTH_SIGNAL_DRIVE_1.12
SIGNAL_STRENGTH_LED6  (via drill 0.33)
  Top 0.254: v68.74,39.21 68.42,39.53 68.42,49.85 65.25,53.02 65.25,55.72 SIGNAL_STRENGTH_6.K
  Bottom 0.254: v68.74,39.21 76.99,30.96 83.98,30.96 84.61,30.32 STRENGTH_SIGNAL_DRIVE_1.13
SIGNAL_STRENGTH_LED7  (via drill 0.33)
  Top 0.254: SIGNAL_STRENGTH_7.K 59.53,57.43 60.58,56.39 60.58,40.64 65.66,35.56 67.31,35.56 v67.44,35.43 | v75.06,31.5 77.6,28.96 81.28,28.96 v81.92,29.59
  Bottom 0.254: v67.44,35.43 71.37,35.43 75.06,31.75 v75.06,31.5 | v81.92,29.59 84.14,29.59 STRENGTH_SIGNAL_DRIVE_1.14
SIGNAL_STRENGTH_LED8  (via drill 0.33)
  Top 0.254: v53.82,53.5 53.82,41.43 55.24,40.01 55.24,6.67 62.39,6.67 64.29,8.57 64.29,11.11 62.07,11.11 61.75,10.79 61.75,10.48 61.12,9.84 STRENGTH_SIGNAL_DRIVE_2.3
  Bottom 0.254: v53.82,53.5 53.34,53.98 47.78,53.98 SIGNAL_STRENGTH_8.K
SIGNAL_STRENGTH_LED9  (via drill 0.33)
  Top 0.254: v55.88,49.85 55.88,47.62 57.15,46.35 57.15,43.66 56.67,43.18 56.67,7.62 60.8,7.62 61.75,8.57 61.75,9.21 62.23,9.68 STRENGTH_SIGNAL_DRIVE_2.4
  Bottom 0.254: v55.88,49.85 55.09,50.64 44.45,50.64 SIGNAL_STRENGTH_9.K
SIGNAL_STRENGTH_LED10  (via drill 0.33)
  Top 0.254: v56.04,43.02 56.04,7.14 61.59,7.14 63.02,8.57 63.02,9.21 63.5,9.68 STRENGTH_SIGNAL_DRIVE_2.5
  Bottom 0.254: v56.04,43.02 45.56,43.02 41.91,46.67 SIGNAL_STRENGTH_10.K
SIGNAL_STRENGTH_LED11  (via drill 0.33)
  Top 0.254: v58.26,36.2 58.26,34.13 63.66,28.73 63.66,24.92 64.29,24.29 64.29,13.49 64.77,13.02 64.77,9.84 STRENGTH_SIGNAL_DRIVE_2.6
  Bottom 0.254: v58.26,36.2 57.63,36.83 SIGNAL_STRENGTH_11.K | SIGNAL_STRENGTH_11.K
SIGNAL_STRENGTH_LED12  (via drill 0.33)
  Top 0.254: v57.78,42.55 66.67,33.66 66.67,29.21 66.04,28.57 66.04,16.51 64.77,15.24 STRENGTH_SIGNAL_DRIVE_2.11
  Bottom 0.254: v57.78,42.55 56.52,42.55 55.88,41.91 55.24,42.55 41.91,42.55 41.27,41.91 SIGNAL_STRENGTH_12.K
SIGNAL_STRENGTH_LED13  (via drill 0.33)
  Top 0.254: v57.63,31.75 63.18,26.19 63.18,15.08 63.5,14.76 STRENGTH_SIGNAL_DRIVE_2.12
  Bottom 0.254: v57.63,31.75 43.18,31.75 SIGNAL_STRENGTH_13.K
SIGNAL_STRENGTH_LED14  (via drill 0.33)
  Top 0.254: v61.75,16.03 61.75,15.24 62.23,14.76 STRENGTH_SIGNAL_DRIVE_2.13 | v46.35,21.75 46.35,27.78 SIGNAL_STRENGTH_14.K
  Bottom 0.254: v61.75,16.03 60.01,17.78 50.32,17.78 v46.35,21.75
SIGNAL_STRENGTH_TRIANGLE_LED  (via drill 0.33)
  Top 0.254: v60.8,24.13 60.8,14.92 60.96,14.76 STRENGTH_SIGNAL_DRIVE_2.14
  Bottom 0.254: v60.8,24.13 59.85,25.08 50.96,25.08 SIGNAL_STRENGTH_TRIANGLE.K
TWI_SCL  (via drill 0.33)
  Top 0.254: v19.37,33.5 17.3,31.43 17.3,30 18.41,28.89 SCL_PL.1 18.57,28.73 19.05,28.26 19.05,27.3 22.38,23.97 22.38,22.7 v23.81,21.27 | v24.77,42.7 24.77,43.18 23.5,43.18 MAIN_DIRECTION_DRIVE.15 | v26.83,15.88 26.83,14.13 IC1.18 | v44.61,15.88 46.67,15.88 46.67,14.61 OTHER_DIRECTION_DRIVE.15 | STRENGTH_SIGNAL_DRIVE_2.15 59.69,14.76 59.21,15.24 v59.21,16.03 59.21,23.5 v62.07,26.35
  Bottom 0.254: v19.37,33.5 22.7,36.83 23.81,36.83 | 23.81,36.83 29.05,36.83 MISC_LED_DRIVE.15 | v24.77,42.7 23.81,41.75 23.81,36.83 | 31.75,15.88 v44.61,15.88 45.88,17.14 58.1,17.14 v59.21,16.03 | 31.75,15.88 v26.83,15.88 | v62.07,26.35 64.14,28.42 83.98,28.42 84.61,27.78 STRENGTH_SIGNAL_DRIVE_1.15 | v23.81,21.27 24.77,20.32 31.43,20.32 31.75,20 31.75,15.88
TWI_SDA  (via drill 0.33)
  Top 0.254: v23.18,30.16 21.75,28.73 SDA_PL.1 | v23.5,23.81 27.46,19.84 27.46,14.29 27.62,14.13 IC1.19 27.78,13.97 27.94,13.81 v27.94,12.7 | v19.84,40.16 19.84,43.18 18.57,43.18 MAIN_DIRECTION_DRIVE.2 | v47.31,8.26 47.31,9.05 46.83,9.53 OTHER_DIRECTION_DRIVE.2 | v58.9,8.26 59.69,9.05 59.69,9.68 STRENGTH_SIGNAL_DRIVE_2.2
  Bottom 0.254: MISC_LED_DRIVE.2 33.97,36.83 33.5,36.83 31.75,35.08 28.1,35.08 v23.18,30.16 22.07,30.16 | v23.5,23.81 22.7,24.61 22.38,24.61 22.07,24.92 22.07,30.16 | v19.84,40.16 19.84,35.4 19.53,35.4 18.73,34.61 18.73,30.16 22.07,30.16 | v58.9,8.26 50.64,8.26 | 50.64,8.26 v47.31,8.26 32.38,8.26 v27.94,12.7 | 50.64,8.26 54.29,11.91 54.45,11.91 55.09,12.54 72.87,12.54 72.87,21.27 78.74,27.15 79.22,27.15 79.69,27.62 STRENGTH_SIGNAL_DRIVE_1.2
TYPE_LED0
  Top 0.254: IC1.28 31.75,19.84 30.64,19.84 30.64,9.21 24.29,2.86 TYPE6.A | TYPE5.K 40.8,2.86 50.16,2.86 TYPE4.A
  Bottom 0.254: TYPE2.K 72.87,2.86 72.07,3.65 51.12,3.65 50.32,2.86 TYPE4.A | TYPE6.A 24.29,2.86 25.08,3.65 39.85,3.65 40.64,2.86 TYPE5.K
TYPE_LED1
  Top 0.254: IC1.29 31.91,20.64 34.45,20.64 34.45,9.05 37.15,6.35 37.15,2.38 37.78,1.75 52.7,1.75 52.7,2.7 TYPE4.K | TYPE2.A 70.33,2.7 69.85,2.7 68.9,1.75 60.48,1.75 60.48,2.7 TYPE3.A
  Bottom 0.254: TYPE3.A 60.33,2.86 52.86,2.86 TYPE4.K | TYPE1.K 87.47,2.7 86.52,1.75 71.44,1.75 70.48,2.7 TYPE2.A
TYPE_LED2
  Top 0.254: TYPE3.K 63.02,2.86 69.37,2.86 69.37,3.17 69.85,3.65 84.93,3.65 84.93,2.86 TYPE1.A | IC1.30 31.91,21.43 34.92,21.43 34.92,9.21 38.1,6.03 38.1,2.86 TYPE5.A
  Bottom 0.254: TYPE6.K 26.83,2.86 38.1,2.86 TYPE5.A 38.26,2.7 39.21,1.75 61.91,1.75 62.87,2.7 TYPE3.K
VBUS
  Top 0.254: USB_FUSE.1 11.91,12.54 10.48,11.11 10.48,10.16 9.53,9.21 CN1.VBUS
VCC  (via drill 0.33)
  Top 0.406: OTHER_DIRECTION_DRIVE.10 53.18,14.61 54.29,14.61 OTHER_DIRECTION_DRIVE.9 54.45,14.45 54.61,14.29 v54.61,13.02 | v59.05,13.18 59.05,10.32 58.58,9.84 STRENGTH_SIGNAL_DRIVE_2.1 | 68.02,15.32 69.37,16.67 69.37,20.95 REAR_OTHER_RIGHT1.A 69.53,21.11 69.85,21.43 69.85,31.75 SIGNAL_STRENGTH_1.A 70.01,31.91 72.07,33.97 72.07,37.94 SIGNAL_STRENGTH_2.A 72.07,38.1 72.07,43.18 SIGNAL_STRENGTH_3.A 71.91,43.34 70.8,44.45 70.8,47.78 SIGNAL_STRENGTH_4.A | 68.02,15.32 67.47,14.76 STRENGTH_SIGNAL_DRIVE_2.9 | REAR_MAIN_RIGHT1.A 74.61,15.24 68.1,15.24 68.02,15.32 | 69.53,56.83 69.53,60.64 OTHER_DIRECTION_2.A 69.69,60.8 69.69,63.18 73.03,66.52 MAIN_DIRECTION_2.A | 69.53,56.83 69.53,54.45 67.47,52.39 SIGNAL_STRENGTH_5.A | MAIN_DIRECTION_0.A 85.09,49.21 81.28,53.02 81.28,58.1 MAIN_DIRECTION_1.A | HWB.2 35.08,26.04 35.88,25.24 35.88,15.08 REAR_MAIN_LEFT1.A 35.88,14.76 35.88,13.97 41.12,13.97 | v23.81,15.4 23.81,14.13 IC1.14 | v33.02,15.24 33.02,16.67 31.91,16.67 IC1.24 | 41.12,13.97 45.4,9.68 OTHER_DIRECTION_DRIVE.1 | 40.48,31.11 38.58,31.11 | 38.58,31.11 35.24,31.11 31.59,27.46 31.59,27.15 30.16,25.72 IC1.34 | 40.48,31.11 40.48,31.75 SIGNAL_STRENGTH_13.A | 20.48,30.8 21.59,30.8 SDA_PL.2 | 20.48,30.8 20.16,30.8 | 20.16,30.8 18.57,30.8 SCL_PL.2 | 21.67,26.11 20.48,27.3 20.48,30.8 | 21.67,26.11 22.07,25.72 IC1.44 | 20.16,30.8 20.16,36.83 18.57,36.83 MAIN_DIRECTION_DRIVE.7 | v23.18,27.62 21.67,26.11 | 40.48,31.11 40.64,31.11 43.66,28.1 43.66,27.94 SIGNAL_STRENGTH_14.A 43.81,27.78 44.93,26.67 44.93,17.94 41.12,14.13 41.12,13.97 | ISP.2 3.81,25.4 3.81,32.54 6.67,35.4 RIPPLE_CAP.1 6.67,35.56 3.02,39.21 3.02,57.31 4.92,59.21 VOLT_REG.3
  Top 0.406: MAIN_DIRECTION_DRIVE.1 18.41,44.61 18.41,54.61 LOCK_TRANSISTOR.C | OTHER_DIRECTION_3.A 61.44,64.93 63.66,67.15 63.66,71.12 MAIN_DIRECTION_3.A | BELOW_LED1.A 55.09,41.43 55.09,46.99 ABOVE_LED1.A 55.09,47.31 55.09,57.31 SIGNAL_STRENGTH_7.A | MAIN_DIRECTION_7.A 24.45,49.21 28.57,53.34 28.57,58.26 MAIN_DIRECTION_6.A | 49.37,56.99 49.37,56.2 OTHER_DIRECTION_7.A | 49.37,56.99 49.37,64.45 OTHER_DIRECTION_4.A | 44.53,56.91 45.09,56.36 45.09,54.13 SIGNAL_STRENGTH_8.A 45.09,53.98 41.91,50.8 41.91,50.64 SIGNAL_STRENGTH_9.A 41.75,50.48 41.75,49.05 39.53,46.83 SIGNAL_STRENGTH_10.A 39.53,46.51 39.53,43.02 38.58,42.07 SIGNAL_STRENGTH_12.A 38.58,41.91 38.58,36.83 SIGNAL_STRENGTH_11.A 38.58,36.67 38.58,31.11 | 44.53,56.91 40.8,60.64 OTHER_DIRECTION_5.A | 49.37,56.99 44.61,56.99 44.53,56.91 | 69.53,56.83 62.71,56.83 62.71,55.88 SIGNAL_STRENGTH_6.A
  Bottom 0.406: STRENGTH_SIGNAL_DRIVE_1.1 79.69,26.35 79.69,22.23 74.77,17.3 74.77,15.24 REAR_MAIN_RIGHT1.A | REAR_OTHER_RIGHT1.A 69.37,20.95 63.66,15.24 61.12,15.24 v59.05,13.18 54.77,13.18 v54.61,13.02 | MAIN_DIRECTION_0.A 85.09,49.05 82.07,49.05 79.69,46.67 OTHER_DIRECTION_0.A 79.53,46.51 75.25,46.51 72.07,43.34 SIGNAL_STRENGTH_3.A | MAIN_DIRECTION_1.A 81.12,58.1 79.53,58.1 76.68,55.24 OTHER_DIRECTION_1.A 76.36,55.09 70.8,60.64 69.69,60.64 OTHER_DIRECTION_2.A | v23.81,15.4 24.13,15.08 33.02,15.08 | 33.02,15.08 35.88,15.08 REAR_MAIN_LEFT1.A | v33.02,15.24 33.02,15.08 | 27.78,27.62 27.78,26.35 42.23,26.35 42.78,26.91 | 27.78,27.62 27.78,29.84 27.94,30 28.57,30 29.05,30.48 MISC_LED_DRIVE.10 | 42.78,26.91 43.66,27.78 SIGNAL_STRENGTH_14.A | 47.39,26.11 46.67,26.83 42.86,26.83 42.78,26.91 | 47.39,26.11 48.26,25.24 SIGNAL_STRENGTH_TRIANGLE.A | SIGNAL_STRENGTH_0.A 62.07,25.24 61.12,26.19 47.47,26.19 47.39,26.11 | 27.78,27.62 v23.18,27.62 | PWR.A 3.33,35.88 2.22,34.77 2.22,25.4 3.65,25.4 ISP.2 | 5.08,59.21 VOLT_REG.3 | 18.26,54.77 LOCK_TRANSISTOR.C 18.41,54.77 | 56.12,72.15 56.2,72.23 62.71,72.23 63.66,71.28 MAIN_DIRECTION_3.A | 56.12,72.15 55.24,71.28 SERVICABILITY_LED1.A | 50.16,72.23 56.04,72.23 56.12,72.15 | 50.16,72.23 47.62,72.23 46.67,71.28 MAIN_DIRECTION_4.A | SIGNAL_STRENGTH_6.A 62.55,55.88 56.67,55.88 55.24,57.31 SIGNAL_STRENGTH_7.A 54.93,57.47 54.61,57.15 50.48,57.15 49.53,56.2 OTHER_DIRECTION_7.A | 32.94,56.75 32.38,57.31 29.69,57.31 | 32.94,56.75 34.13,55.56 OTHER_DIRECTION_6.A | 28.73,58.26 MAIN_DIRECTION_6.A 28.57,58.26 | MISC_LED_DRIVE.1 34.13,38.1 34.61,37.62 37.78,37.62 38.58,36.83 SIGNAL_STRENGTH_11.A
  Bottom 0.406: 36.83,60.8 36.83,66.52 MAIN_DIRECTION_5.A | 36.83,60.8 40.64,60.8 OTHER_DIRECTION_5.A | 32.94,56.75 36.83,60.64 36.83,60.8 | 50.16,72.23 50.16,64.61 49.37,64.61 OTHER_DIRECTION_4.A
  pour Bottom: 2.41,58.04 14.99,58.04 17.14,55.88 17.14,52.83 17.65,52.32 18.8,52.32 19.43,52.96 19.43,56.9 29.97,56.9 30.1,60.96 2.41,60.83 2.03,60.45 2.03,58.42
  pour Top (isolate 0.203, rank 5): -3.56,77.47 98.68,77.47 104.65,71.5 104.65,-0.25 98.81,-6.1 -1.14,-6.1 -12.06,4.83 -12.06,68.96

## Text on the board
tNames: AIRBORNE | LONG / RANGE | MEDIUM / RANGE | SHORT / RANGE | EARLY / WARNING | AWACS